# Altium PCB DORY.PcbDoc (part 2 of 2)
Units mil, origin at the board's own origin, x right, y up, seen from the top; angles counter-clockwise.
Board outline 4500 x 4000 mil, 4 copper layers (Signal Layer 1, Signal Layer 2, Signal Layer 3, Signal Layer 4), stack 59.904 mil thick; 158 components, 96 nets, 587 pads, 62 vias.
Unrouted connection lines stored in the file: 389.
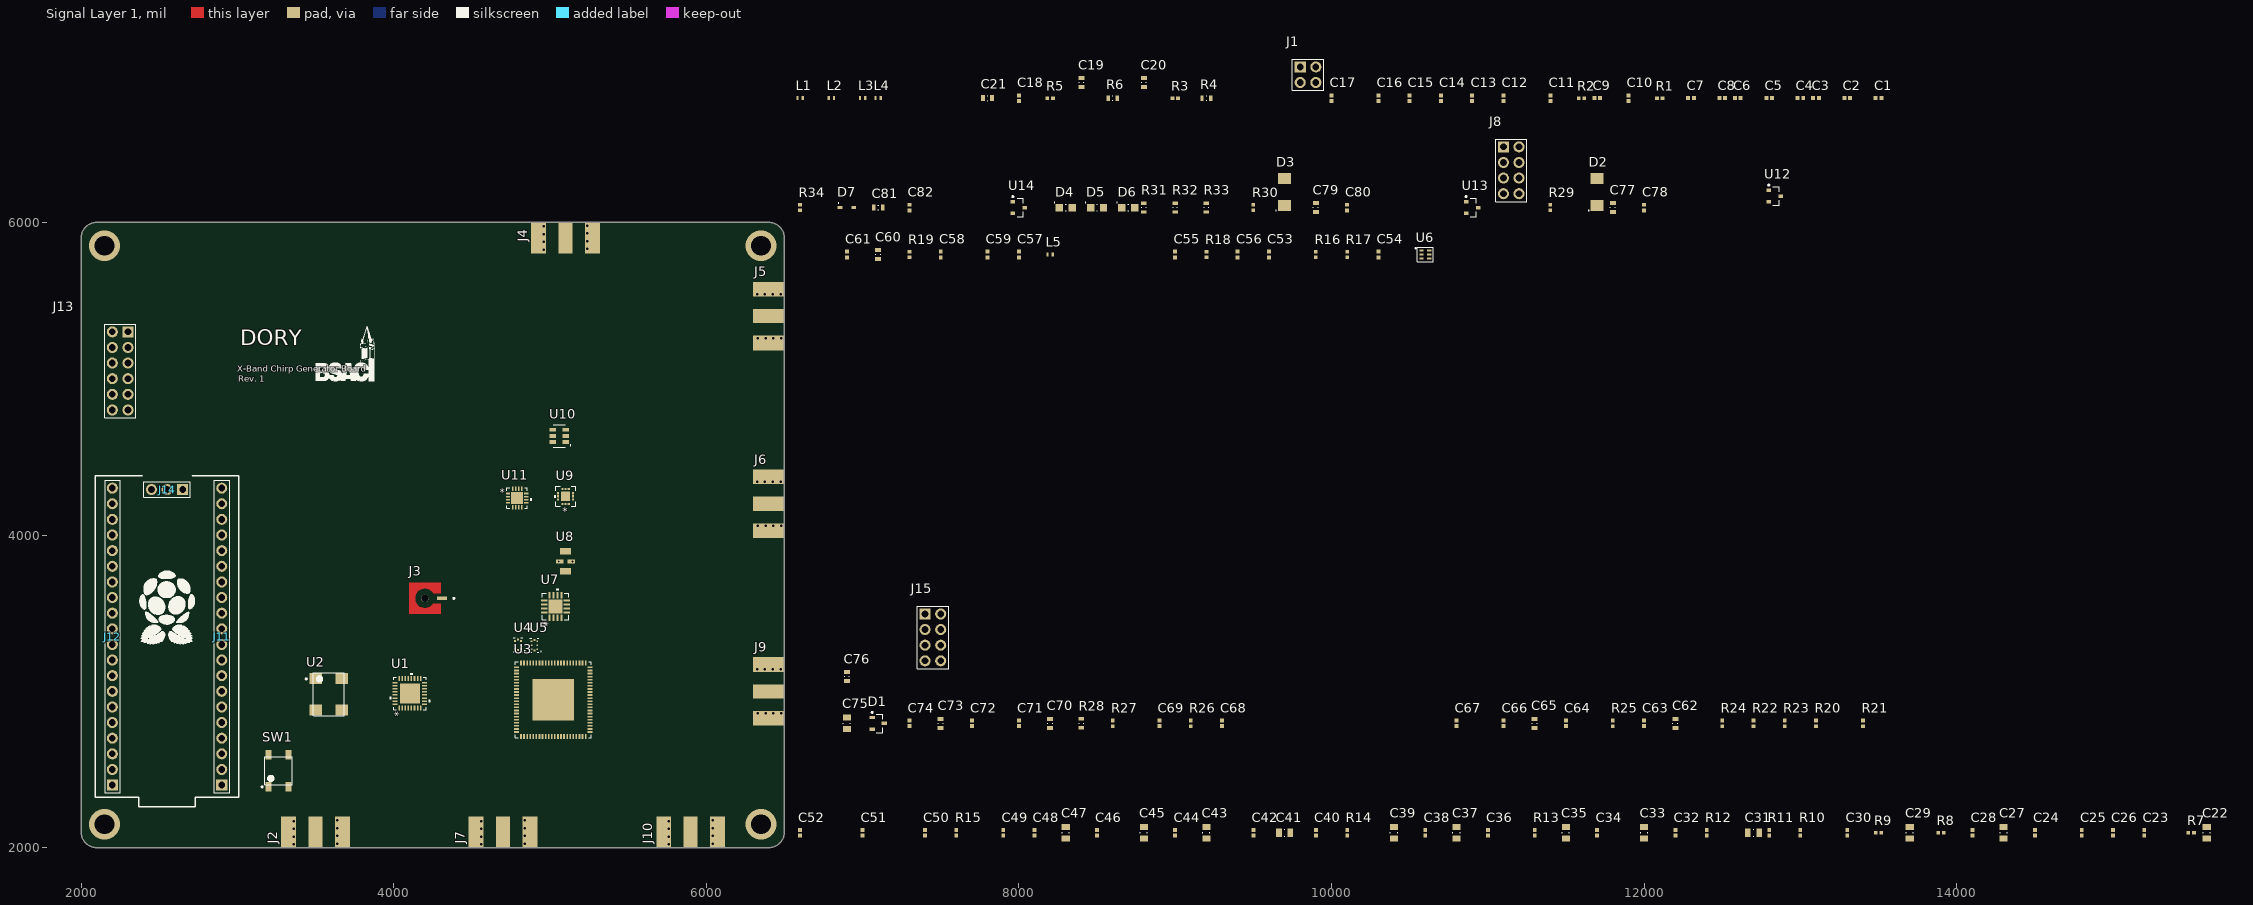
[diagram p0: Signal Layer 1 view]

## Part data (continued)
SW1: "Switch Tactile OFF Mom SPST Round Button Gull Wing 50mA 12VDC 100000Cycles 1.77N Surface Mount T/R", Contact Current Rating=50mA, Contact Resistance="100 mΩ", Insulation Resistance="100 MΩ", Manufacturer=C&K, Max Operating Temperature=70°C, Max Voltage Rating (DC)=12V, Maximum Current="50 mA", Maximum Voltage="12 VDC", Min Operating Temperature=-40°C, Operating Force=2.26N, Supplier Part Number=108-PTS647SM38SMTR2LFSCT-ND, Bounce Time="<=5 ms", Category="Tactile Switches", ComponentLink1Description=https://datasheet.octopart.com:443/PTS647SM38SMTR2LFS-C%26K-Components-datasheet-180017464.pdf?src-supplier=IHS, ComponentLink1URL=https://datasheet.octopart.com:443/PTS647SM38SMTR2LFS-C%26K-Components-datasheet-180017464.pdf?src-supplier=IHS, ComponentLink2Description=https://datasheet.octopart.com:443/PTS647SM38SMTR2LFS-C%26K-Components-datasheet-117317067.pdf?src-supplier=Future+Electronics, ComponentLink2URL=https://datasheet.octopart.com:443/PTS647SM38SMTR2LFS-C%26K-Components-datasheet-117317067.pdf?src-supplier=Future+Electronics, ComponentLink3Description=https://datasheet.octopart.com:443/PTS647SM38SMTR2-LFS-C%26K-Components-datasheet-175422368.pdf?src-supplier=Farnell, ComponentLink3URL=https://datasheet.octopart.com:443/PTS647SM38SMTR2-LFS-C%26K-Components-datasheet-175422368.pdf?src-supplier=Farnell, ComponentLink4Description=https://datasheet.octopart.com:443/PTS647SM38SMTR2LFS-C%26K-Components-datasheet-145017121.pdf?src-supplier=Electro+Sonic, ComponentLink4URL=https://datasheet.octopart.com:443/PTS647SM38SMTR2LFS-C%26K-Components-datasheet-145017121.pdf?src-supplier=Electro+Sonic, ComponentLink5Description=https://datasheet.octopart.com:443/PTS-647-SM38-SMTR2-LFS-C%26K-Components-datasheet-119449707.pdf?src-supplier=RS+(Formerly+Allied+Electronics), ComponentLink5URL=https://datasheet.octopart.com:443/PTS-647-SM38-SMTR2-LFS-C%26K-Components-datasheet-119449707.pdf?src-supplier=RS+(Formerly+Allied+Electronics), Country of Origin="Mainland China", Electrical Life=100kcycles, Export Control Classification Number (ECCN) Code=EAR99, Harmonized Tariff Schedule (HTS) Code=8536.50.90.40, Height=2.9mm, Introduction Date=2019-06-11, Length=4.5mm, Life (Cycles)=100kcycles, Lifecycle Status=Production, Manufacturer Part Number=Y97KT23B2NAFP, Max Current Rating=50mA, Mounting Technology="Surface Mount", Number of Positions=1, Pricing="1=0.26, 10=0.226, 25=0.2116, 100=0.1897, 250=0.17588, 500=0.16596, 1000=0.15666 (USD)", REACH SVHC=Yes, RoHS=Compliant, Schedule B="8536509065, 8536509065|8536509065, 8536509065|8536509065|8536509065, 8536509065|8536509065|8536509065|8536509065", Stock=37245, Supplier=DigiKey, Throw Configuration=SPST, Voltage Rating (DC)=12V
U1: "Wideband Synthesizer with Integrated VCO", Manufacturer_Name="Analog Devices Inc", Copyright="Copyright (C) 2026 Ultra Librarian. All rights reserved.", Manufacturer_Part_Number=ADF4350BCPZ, RefDes=RefDes, Type=Type
U2: "50MHz 5.0x7.0mm Surface Mount CMOS Clock Oscillator", Frequency="50 MHz", Frequency Stability="+-25 ppm", Manufacturer=Connor-Winfield, Supply Voltage="3.3 V", Temperature Range="-20C to 70C", Manufacturer Part Number=CWX813-050.0M
U3: "3.5 GSPS Direct Digital Synthesizer with 12-bit DAC", Manufacturer_Name="Analog Devices Inc", Copyright="Copyright (C) 2026 Ultra Librarian. All rights reserved.", Datasheet=https://www.analog.com/media/en/technical-documentation/data-sheets/AD9914.pdf, Manufacturer_Part_Number=AD9914BCPZ, RefDes=RefDes, Type=Type
U4 U5: "LTCC Low Pass Filter, DC - 1525 MHz, 50Ω", Manufacturer=Mini-Circuits, Manufacturer Part Number=LFCG-1525+
U7: library part LTC5576IUFPBF, "3GHz to 8GHz High Linearity Active Upconverting Mixer", Manufacturer_Name="Analog Devices Inc", Copyright="Copyright (C) 2026 Ultra Librarian. All rights reserved.", Datasheet=https://www.analog.com/media/en/technical-documentation/data-sheets/5576fa.pdf, Manufacturer_Part_Number=LTC5576IUF#PBF, RefDes=RefDes, Type=Type
U8: "LTCC Band Pass Filter, 4200 - 4700 MHz, 50Ω", Manufacturer=Mini-Circuits, Manufacturer Part Number=BFCN-4440+
U9: "x2 Active Multiplier SMT, 8 to 22 GHz Fout", Manufacturer_Name="Analog Devices Inc", Copyright="Copyright (C) 2026 Ultra Librarian. All rights reserved.", Datasheet=https://www.analog.com/media/en/technical-documentation/data-sheets/hmc573.pdf, Manufacturer_Part_Number=HMC573LC3B, RefDes=RefDes, Type=Type
U10: "LTCC High Pass Filter, 7900 - 11000 MHz", Manufacturer=Mini-Circuits, Manufacturer Part Number=HFCN-7150+
U11: "Active Bias Controller SMT", Manufacturer_Name="Analog Devices Inc", Copyright="Copyright (C) 2026 Ultra Librarian. All rights reserved.", Datasheet=https://www.analog.com/media/en/technical-documentation/data-sheets/hmc981.pdf, Manufacturer_Part_Number=HMC981LP3E, RefDes=RefDes, Type=Type
U12 U13 U14: "P-Channel 20 V 3.1A (Tc) 860mW (Ta), 1.6W (Tc) Surface Mount SOT-23-3 (TO-236)", Manufacturer="Vishay Siliconix", Manufacturer Part Number=SI2301CDS-T1-GE3

## Via types
v1: diameter 16, hole 16, Signal Layer 1 to Signal Layer 4, 56 vias
v2: diameter 196.85, hole 125.98, Signal Layer 1 to Signal Layer 4, 4 vias
v3: diameter 20, hole 12, Signal Layer 1 to Signal Layer 4, 2 vias

## Nets (pads, with @x,y where several pads share a name; then routed paths per layer and width w, separated by ;. In a path a pad name is that pad's centre, name@x,y a point inside that pad or via, vN(x,y) a via of type N, cw(c..) or ccw(c..) an arc to the next point about the centre after c; other vN are vias at no path point)
1V8: C22.2 C23.2 C27.2 C28.2 C39.2 C40.2 C41.2 C42.2 C43.2 C44.2 C81.2 C82.2 J8.3 R33.1 U3.6 U3.23 U3.32 U3.56 U3.57 U3.73 U14.2
3V3: C1.2 C2.2 C3.2 C4.2 C5.2 C6.2 C8.1 C9.1 C16.2 C17.2 C18.2 C29.2 C30.2 C31.2 C32.2 C33.2 C34.2 C35.2 C36.2 C37.2 C38.2 C45.2 C46.2 C47.2 C48.2 C79.2 C80.2 J8.2 J13.6 J13.12 L1.2 L2.2 L3.2 L4.2 R9.2 R32.1 U1.6 U1.10 U1.16 U1.17 U1.28 U1.32 U2.1 U2.4 U3.16 U3.34 U3.36 U3.39 U3.40 U3.43 U3.47 U3.50 U3.52 U3.53 U3.60 U3.83 U13.2
5V: C60.2 C61.2 C70.2 C71.2 C73.2 C74.2 C77.2 C78.2 J8.1 R31.1 U7.6 U7.7 U11.1 U11.5 U12.2
CPOUT_4: C76.2 U11.6
DDS_AOUT_2_N: C52.2 U3.41
DDS_AOUT_2_P: C51.2 U3.42
DDS_CS: J11.12 U3.22
DDS_DRCTL: J12.19 J13.1 J15.1 U3.63
DDS_DRHOLD: J12.17 J13.2 J15.2 U3.64
DDS_DROVER: J12.16 J13.3 J15.3 U3.65
DDS_IO_UPDATE: J11.11 U3.86
DDS_OSK: J12.15 J13.4 J15.4 U3.66
DDS_OUT_N: C58.1 U5.4
DDS_OUT_P: C57.1 U4.4
DDS_PS0: J11.17 U3.25
DDS_PS1: J11.19 U3.26
DDS_PS2: J11.20 U3.27
DDS_REFCLK_2_N: C50.1 U3.54
DDS_REFCLK_2_P: C49.1 U3.55
DDS_RST: J11.10 U3.85
DDS_SCLK: J11.14 U3.21
DDS_SDIO: J11.15 U3.20
DDS_SDO: J11.16 U3.19
GND: C1.1 C2.1 C3.1 C4.1 C5.1 C6.1 C8.2 C9.2 C10.1 C11.1 C12.1 C13.1 C14.1 C15.1 C16.1 C17.1 C18.1 C19.1 C20.2 C21.1 C22.1 C23.1 C24.2 C25.2 C26.2 C27.1 C28.1 C29.1 C30.1 C31.1 C32.1 C33.1 C34.1 C35.1 C36.1 C37.1 C38.1 C39.1 C40.1 C41.1 C42.1 C43.1 C44.1 C45.1 C46.1 C47.1 C48.1 C56.1 C59.1 C60.1 C61.1 C62.2 C63.2 C64.2 C65.2 C66.2 C67.2 C68.1 C69.1 C70.1 C71.1 C72.1 C73.1 C74.1 C75.1 C77.1 C78.1 C79.1 C80.1 C81.1 C82.1 D1.2 D2.1 D3.1 D4.2 D5.2 D6.2 D7.1 J1.3 J1.4 J2.2 J3.2 J4.2 J5.2 J6.2 J7.2 J8.4 J8.5 J8.6 J9.2 J10.2 J11.3 J11.8 J11.13 J11.18 J12.3 J12.8 J12.13 J12.18 J13.5 J13.11 J14.2 J15.5 J15.6 J15.7 J15.8 R1.1 R2.2 R7.1 R8.2 R10.2 R11.2 R12.2 R13.1 R14.2 R19.1 R27.2 R28.1 R29.1 R30.1 R34.1 SW1.3 SW1.4 U1.8 U1.9 U1.11 U1.18 U1.21 U1.27 U1.31 U1.33 U2.2 U3.7 U3.17 U3.24 U3.33 U3.35 U3.37 U3.38 U3.44 U3.46 U3.49 U3.51 U3.74 U3.84 U3.HTAB U4.1 U4.2 U4.3 U4.5 U4.6 U4.7 U5.1 U5.2 U5.3 U5.5 U5.6 U5.7 U6.A2 U6.B2 U7.4 U7.9 U7.11 U7.12 U7.13 U7.14 U7.16 U7.17 U8.2 U8.4 U9.1 U9.3 U9.7 U9.9 U9.13 U10.2 U10.4 U10.5 U10.6 U11.17
  other v1: 3360,2020 4560,2020 5760,2020 3640,2025 4840,2025 6040,2025 3360,2070 4560,2070 5760,2070 3640,2075 4840,2075 6040,2075 3360,2120 4560,2120 5760,2120 3640,2125 4840,2125 6040,2125 3360,2170 4560,2170 5760,2170 3640,2175 4840,2175 6040,2175 6330,2860 6380,2860 6430,2860 6480,2860 6325,3140 6375,3140 6425,3140 6475,3140 6330,4060 6380,4060 6430,4060 6480,4060 6325,4340 6375,4340 6425,4340 6475,4340 6330,5260 6380,5260 6430,5260 6480,5260 6325,5540 6375,5540 6425,5540 6475,5540 4960,5825 5240,5830 4960,5875 5240,5880 4960,5925 5240,5930 4960,5975 5240,5980
  other v2: 2150,2150 6350,2150 2150,5850 6350,5850
  other v3: 5056.5,3831 5143.5,3831
LO_3: C54.2 C56.2 U7.15
MCU_RESET_6: J12.11 SW1.1 SW1.2
MIXER_EN: J12.20 J13.8 U7.5
MIXER_OUT: R22.1 U8.3
NetC7_1: C7.1 U1.29
NetC10_2: C10.2 C11.2 U1.24
NetC12_2: C12.2 C13.2 U1.19
NetC14_2: C14.2 C15.2 U1.23
NetC21_2: C21.2 R6.1
NetC24_1: C24.1 C25.1 C26.1 U3.45
NetC51_1: C51.1 U4.8
NetC52_1: C52.1 U5.8
NetC53_1: C53.1 U6.A3
NetC54_1: C54.1 R17.2
NetC55_1: C55.1 U6.B3
NetC57_2: C57.2 U7.3
NetC58_2: C58.2 U7.2
NetC59_2: C59.2 L5.1 U7.10
NetC72_2: C72.2 U11.16
NetC76_1: C76.1 D1.3
NetD2_2: D2.2 J7.1 U12.3
NetD3_2: D3.2 J9.1 U13.3
NetD4_1: D4.1 R31.2
NetD5_1: D5.1 R32.2
NetD6_1: D6.1 R33.2
NetD7_2: D7.2 J10.1 U14.3
NetJ2_1: J2.1 R5.1
NetJ3_1: J3.1 R18.1
NetJ4_1: J4.1 U10.3
NetJ5_1: J5.1 R24.2
NetJ6_1: J6.1 R25.2
NetR2_1: R2.1 U1.22
NetR3_1: R3.1 U2.3
NetR7_2: R7.2 U3.48
NetR8_1: R8.1 U3.67
NetR9_1: R9.1 U3.28
NetR10_1: R10.1 U3.29
NetR11_1: R11.1 U3.30
NetR12_1: R12.1 U3.31
NetR13_2: R13.2 U3.18
NetR14_1: R14.1 U3.62
NetR16_1: R16.1 U6.A1
NetR16_2: R16.2 R17.1 R18.2
NetR19_2: R19.2 U7.8
NetR20_1: R20.1 U9.8
NetR20_2: R20.2 R21.1 R24.1
NetR21_2: R21.2 U10.1
NetR22_2: R22.2 R23.1 R25.1
NetR23_2: R23.2 U9.2
NetR26_2: R26.2 R27.1 U11.2
NetR28_2: R28.2 U11.15
NetR29_2: R29.2 U12.1
NetR30_2: R30.2 U13.1
NetR34_2: R34.2 U14.1
RF_3: L5.2 U8.1
VCO_CLK: J11.4 U1.1
VCO_CPOUT_1: C19.2 J1.1 R4.1 R6.2 U1.7
VCO_DATA: J11.5 U1.2
VCO_EN: J11.1 U1.4
VCO_LD: J11.9 U1.25
VCO_LE: J11.7 R1.2 U1.3
VCO_MUXOUT: J11.6 U1.30
VCO_REFIN_1: C7.2 R3.2 R5.2
VCO_RF_EN: J11.2 J13.7 U1.26
VCO_RFOUTA_N: C50.2 L2.1 R15.1 U1.13
VCO_RFOUTA_P: C49.2 L1.1 R15.2 U1.12
VCO_RFOUTB_N: C53.2 L4.1 U1.15
VCO_RFOUTB_P: C55.2 L3.1 U1.14
VCO_VTUNE_1: C20.1 J1.2 R4.2 U1.20
VDD_4: C65.1 C66.1 C67.1 C68.2 R26.1 U9.10 U11.12
VGG_4: C62.1 C63.1 C64.1 C69.2 U9.12 U11.11
VNEG_4: C75.2 D1.1 U11.9
pads on no net: J8.7 J8.8 J12.1 J12.2 J12.4 J12.5 J12.6 J12.7 J12.9 J12.10 J12.12 J12.14 J13.9 J13.10 J14.1 J14.3 U1.5 U3.1 U3.2 U3.3 U3.4 U3.5 U3.8 U3.9 U3.10 U3.11 U3.12 U3.13 U3.14 U3.15 U3.58 U3.59 U3.61 U3.68 U3.69 U3.70 U3.71 U3.72 U3.75 U3.76 U3.77 U3.78 U3.79 U3.80 U3.81 U3.82 U3.87 U3.88 U6.B1 U7.1 U9.4 U9.5 U9.6 U9.11 U11.3 U11.4 U11.7 U11.8 U11.10 U11.13 U11.14

## Polygon pours and split planes (outlines as drawn)
GND on Signal Layer 2 "GND_L02_P000" (solid, pour order 0): 2000,2000 2000,6000 6500,6000 6500,2000
no net on Signal Layer 4 "NONET_L04_P001" (solid, pour order 1): 2000,6000 6500,6000 6500,2000 2000,2000

## Silkscreen, mask and mechanical layers (free items; w line width, h text height)
Top Overlay:
  drawing of 31 lines, arcs and shapes, not listed
  text "DORY" at 3018.98,5213.12 h100
  text "X-Band Chirp Generator Board" at 2998.98,5046.01 h40
  text "Rev. 1" at 3006.98,4979.01 h40
Mechanical 1:
  the board outline again, w10
Mechanical 13:
  lines w3.94: 2136.22,2289.64 2370,2289.64 2370,2261.22 2670,2261.22 2730,2261.22 2730,2289.64 2962.99,2289.64 2962.99,4353.65 2136.22,4353.65 2136.22,2289.64
Mechanical 15:
  lines w1.97: 2530.32,3361.22 2569.69,3361.22 ; 2550,3341.54 2550,3380.91 ; 2070,2261.22 2070,4421.22 3030,4421.22 3030,2261.22 2070,2261.22

## Text inside footprints (layer, text, board x,y; h text height)
U1: Top Overlay "*" at 4050.06,2838.5 h50 r90; Mechanical 13 "*" at 4050.06,2895.5 h50 r90
U7: Top Overlay "*" at 5008.54,3412.8 h50 r90; Mechanical 13 "*" at 5008.54,3479.33 h50 r90
U9: Top Overlay "*" at 5112.5,4193.43 h50 r180; Mechanical 13 "*" at 5112.5,4253.43 h50 r180
U11: Top Overlay "*" at 4679.66,4250.37 h50; Mechanical 13 "*" at 4732.66,4250.37 h50